# Altium PCB esp-programmer.PcbDoc
Units mm, origin at the board's own origin, x right, y up, seen from the top; angles counter-clockwise.
Board outline 34.14 x 17.02 mm, 2 copper layers (Top Layer, Bottom Layer); 18 components, 17 nets, 73 pads, 35 vias.
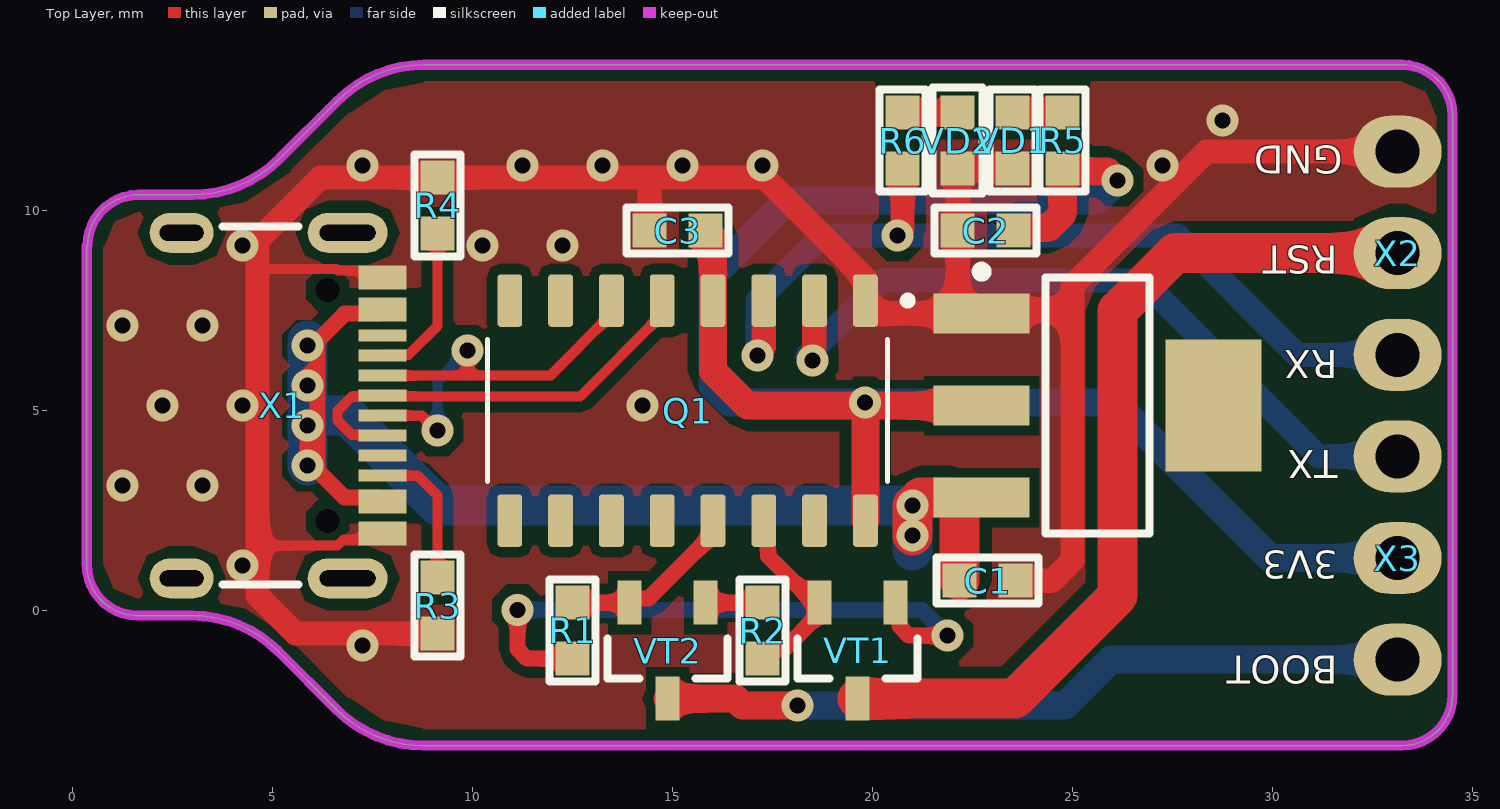
[diagram p0: Top Layer view]
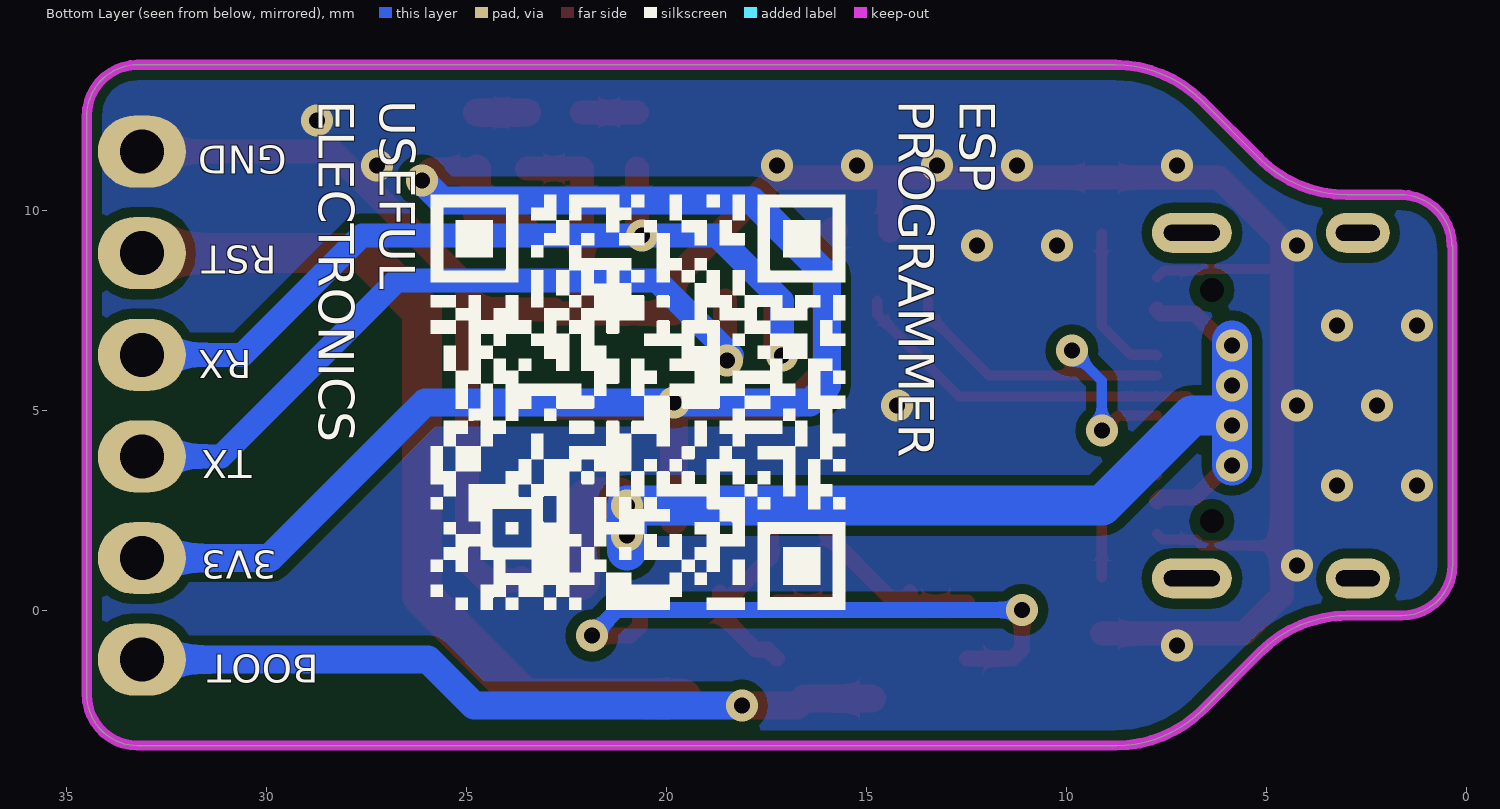
[diagram p1: Bottom Layer view, seen from below]
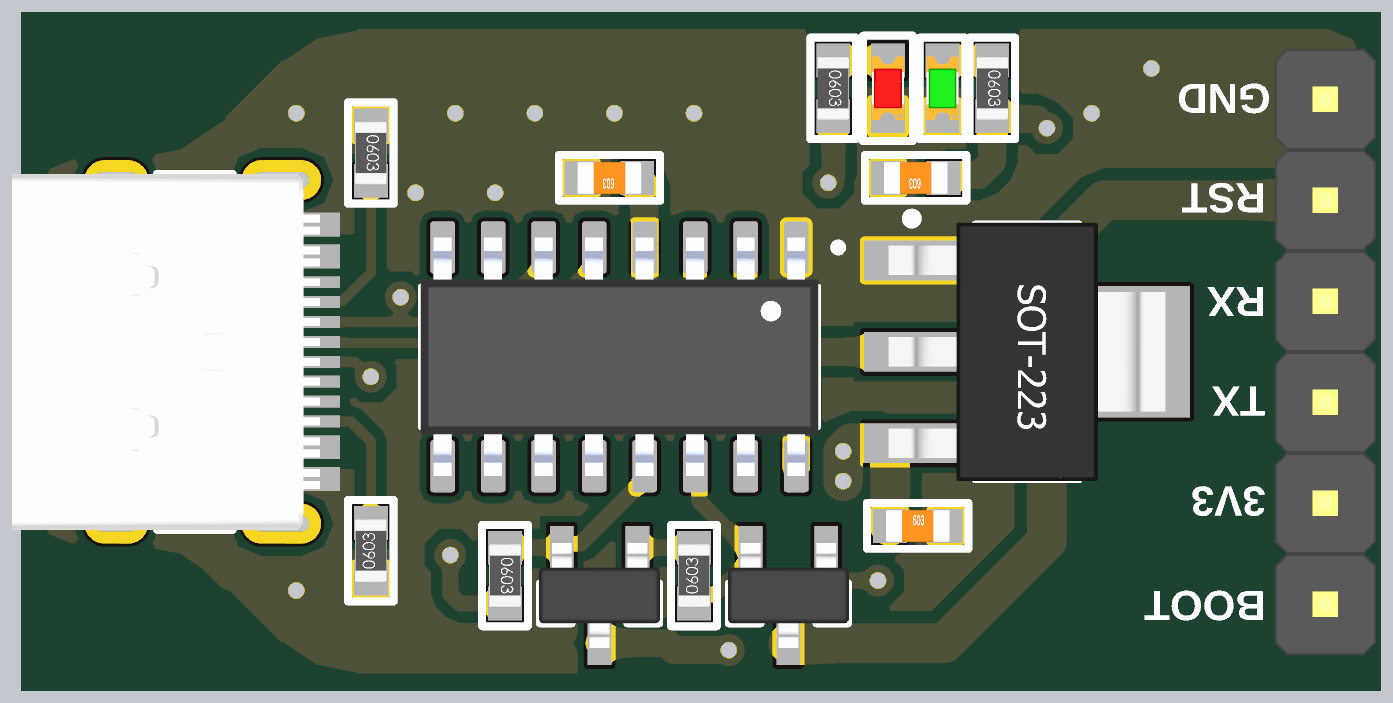
[diagram p2: 3D render of the assembled board from above, using the file's embedded part models]

## Layer stack, top to bottom
Top Solder: solder mask 0.0102, Solder Resist, Dk 3.5
Top Layer: signal copper 0.0356
Dielectric 1: dielectric 0.32, FR-4, Dk 4.8
Bottom Layer: signal copper 0.0356
Bottom Solder: solder mask 0.0102, Solder Resist, Dk 3.5

## Board outline
1.625,-0.125 2.98,-0.125 cw(c2.98,-3.191) 5.148,-1.023 6.602,-2.477 ccw(c8.77,-0.309) 8.77,-3.375 33.23,-3.375 ccw(c33.23,-2.105) 34.5,-2.105 34.5,12.375 ccw(c33.23,12.375) 33.23,13.645 31.923,13.645 8.79,13.645 ccw(c8.79,10.579) 6.622,12.747 5.168,11.293 cw(c3,13.461) 3,10.395 1.645,10.395 ccw(c1.645,9.125) 0.375,9.125 0.355,9.125 0.355,1.145 ccw(c1.625,1.145)

## Design rules (kind name [scope] priority, off if disabled: settings)
Clearance [All] p1: gap=0.1 ignorepadtopadclearanceinfootprint=FALSE except(0.25: Arc-Poly Track-Poly SMDPad-Poly THPad-Poly Via-Poly Fill-Poly Poly-Poly)
ComponentClearance [All] p1: gap=0 collisioncheckmode=3 verticalgap=0 showdistances=FALSE
PolygonConnect [All] p1: connectstyle=Direct reliefconductorwidth=0.254 reliefentries=4 polygonreliefangle="90 Angle" airgapwidth=0.254
RoutingVias [All] p1: holewidth=0.711 width=1.27 viastyle="Through Hole" minholewidth=0.2 minwidth=0.5 maxholewidth=0.711 maxwidth=1.27
SolderMaskExpansion [All] p1: expansion=0.102 istentingtop=FALSE
Width [All] p1: maxlimit=2 minlimit=0.2 preferedwidth=0.5
29 further rules are at their usual default settings.

## Components (designator, comment, footprint, x,y, rotation, side; value= is the part's Value field where it differs from the comment)
C1 "CL10B104KA8NNNL" "CAP: 0603" 22.875,0.75 r0 top value=0.1μF
C2 "CL10B104KA8NNNL" "CAP: 0603" 22.825,9.5 r180 top value=0.1μF
C3 "CL10B104KA8NNNL" "CAP: 0603" 15.125,9.5 r180 top value=0.1μF
Q1 "CH340C" CH240C 15.375,5 r270 top
R1 "RC0603FR-0710KL" "RES: 0603" 12.5,-0.5 r270 top value=10k
R2 "RC0603FR-0710KL" "RES: 0603" 17.25,-0.5 r90 top value=10k
R3 "RC0603FR-075K1L" "RES: 0603" 9.125,0.125 r90 top value=5.1k
R4 "RC0603FR-075K1L" "RES: 0603" 9.125,10.125 r270 top value=5.1k
R5 "RC0603FR-07510RL" "RES: 0603" 24.75,11.75 r270 top value=510
R6 "RC0603FR-07510RL" "RES: 0603" 20.75,11.75 r270 top value=510
VD1 "HSMG-C190" "LED: 0603G" 23.5,11.75 r270 top
VD2 "155060SS75300" "LED: 0603R" 22.125,11.75 r270 top
VT1 "BC847BLT1G" SOT23 19.625,-1 r270 top
VT2 "BC847BLT1G" SOT23 14.875,-1 r270 top
X1 "USB Type C" "CON: TYPE-C-31-M-12 (USB)" 6.375,5.125 r90 top
X2 "PMbus" "CON: PLS-3" 33.125,8.935 r270 top
X3 "PMbus" "CON: PLS-3" 33.125,1.315 r270 top
? "AMS1117-3.3V" SOT223 25.625,5.125 r0 top

## Footprints (in the part's own frame and the unit in brackets; to place one, negate y for a bottom-side part, rotate by r counter-clockwise, add the part's x,y. Pads: shape width x height; smd on the part's side, far side on the other; paste and mask are expansions set on the pad)
"CAP: 0603" [mm]
  rect 0.85x0.85 smd mask+0.05: 1(-0.7,0) 2(0.7,0)
  silkscreen extent -1.28,-0.58 1.28,0.58, body extent -0.8,-0.4 0.8,0.4, height 0.3
CH240C [mm]
  rrect25% 1.31x0.62 smd: 1(-2.75,4.445) 2(-2.75,3.175) 3(-2.75,1.905) 4(-2.75,0.635) 5(-2.75,-0.635) 6(-2.75,-1.905) 7(-2.75,-3.175) 8(-2.75,-4.445) 9(2.75,-4.445) 10(2.75,-3.175) 11(2.75,-1.905) 12(2.75,-0.635) 13(2.75,0.635) 14(2.75,1.905) 15(2.75,3.175) 16(2.75,4.445)
  silkscreen extent -2.85,-5 1.78,5.6, body extent -3,-5 3,5, height 1.8
"CON: PLS-3" [mm]
  oval 1.8x2.2 hole 1.1: 1(-2.54,0) 2(0,0) 3(2.54,0)
  body extent -3.81,-1.27 3.81,1.27, height 8.54
"CON: TYPE-C-31-M-12 (USB)" [mm]
  rect 0.6x1.2 smd mask+0: A1(3.2,-1.375) A4(2.4,-1.375) B1(-3.2,-1.375) B4(-2.4,-1.375)
  rect 0.3x1.2 smd mask+0: A5(1.25,-1.375) A6(0.25,-1.375) A7(-0.25,-1.375) A8(-1.25,-1.375) B5(-1.75,-1.375) B6(-0.75,-1.375) B7(0.75,-1.375) B8(1.75,-1.375)
  oval 1x2 hole 0.4 slot 1.4 at 90 deg mask+0.075: MH(-4.32,-0.5) MH(4.32,-0.5)
  oval 1x1.6 hole 0.4 slot 1.1 at 90 deg mask+0.075: MH(-4.32,3.65) MH(4.32,3.65)
  round 0 hole 0.6 mask+0.075: MH(-2.89,0) MH(2.89,0)
  silkscreen extent -4.47,0.72 4.47,2.63, body extent -4.48,-1.48 4.48,6.28, height 3.26
"LED: 0603G" [mm]
  rect 0.85x0.85 smd mask+0.05: 1(-0.7,0) 2(0.7,0)
  silkscreen extent -1.28,-0.58 1.28,0.58, body extent -0.8,-0.4 0.8,0.4, height 0.6
"LED: 0603R" [mm]
  rect 0.85x0.85 smd: 1(-0.7,0) 2(0.7,0)
  silkscreen extent -1.33,-0.63 1.33,0.63, body extent -0.8,-0.4 0.8,0.4, height 0.6
"RES: 0603" [mm]
  rect 0.85x0.85 smd mask+0.05: 1(-0.7,0) 2(0.7,0)
  silkscreen extent -1.28,-0.58 1.28,0.58, body extent -0.8,-0.4 0.8,0.4, height 0.44
SOT23 [mm]
  rect 1.1x0.6 smd: 1(-1.2,0.95) 2(-1.2,-0.95) 3(1.2,0)
  silkscreen extent -0.3,-1.5 0.7,1.5, body extent -1.32,-1.52 1.32,1.52, height 1.12
SOT223 [mm] "SOT223, 4-Leads, Body 6,50x7,00mm (avg), Pitch 2,30mm, IPC Medium Density"
  rect 2.4x1 smd: 1(-2.9,2.3) 2(-2.9,0) 3(-2.9,-2.3)
  rect 2.4x3.3 smd: 4(2.9,0)
  round 0.5 on Mech1: ""(-3,2.7)
  silkscreen extent -3.02,-3.2 1.3,3.47, body extent -3.48,-3.25 3.48,3.25, height 1.65

## Part data
C1 C2 C3: "0.1uF, 25V, 0603, X7R, ±10%, -55...+125°C", Manufacturer=Samsung, Package=0603, HelpURL=https://ru.mouser.com/ProductDetail/Samsung-Electro-Mechanics/CL10B104KA8NNNL?qs=xZ%2FP%252Ba9zWqaq7Qa7Zbe03w%3D%3D, Manufacturer Part Number=CL10B104KA8NNNL, PartNumber=CL10B104KA8NNNL
R1 R2: "10 kOhms, 0603, ±1%, 0.1W, -55...+155°C", Manufacturer=Yageo, Package=0603, Component Type=Resistors, HelpURL=https://ru.mouser.com/ProductDetail/YAGEO/RC0603FR-0710KL?qs=%2Fha2pyFaduhXXNW8qwNUNiw8kLtHezvba1btfWQYTvQl0E5hN277pA%3D%3D, Manufacturer Part Number=RC0603FR-0710KL, PartNumber=RC0603FR-0710KL
R3 R4: "5.1 kOhms, 0603, ±1%, 0.1W, -55...+155°C", Manufacturer=Yageo, Package=0603, HelpURL=https://eu.mouser.com/ProductDetail/YAGEO/RC0603FR-075K1L?qs=gt6vzsuosg2jUUwxnI2PJQ%3D%3D, PartNumber=RC0603FR-075K1L
R5 R6: "510 Ohms, 0603, ±1%, 0.1W, -55...+155°C", Manufacturer=YAGEO, Package=0603, Component Type=Resistors, HelpURL=https://www.mouser.com/ProductDetail/YAGEO/RC0603FR-07510RL?qs=gt6vzsuosg04lV7mPQHzdw%3D%3D, Manufacturer Part Number=RC0603FR-07510RL, PartNumber=RC0603FR-07510RL
VD1: "LED, Green, case 0603, 2.2V, 20mA, -40...+85°C", Color=GREEN, Manufacturer="Broadcom / Avago", Package=0603, Component Type=Diodes, HelpURL=https://www.mouser.com/ProductDetail/Broadcom-Avago/HSMG-C190?qs=YDL0qNrpDT605sxOaps8VQ%3D%3D, Manufacturer Part Number=HSMG-C190, PartNumber=HSMG-C190
VD2: "LED, Red, case 0603, 2V, 20mA, -40...+85°C", Color=RED, Manufacturer=Wurth, Package=0603, Component Type=Diodes, HelpURL=https://ru.mouser.com/ProductDetail/Wurth-Elektronik/155060SS75300?qs=GedFDFLaBXFp%252Bdn3xLi%2Ftw%3D%3D, Manufacturer Part Number=155060SS75300, PartNumber=155060SS75300
VT1 VT2: "NPN, 45V, 100mA, 100MHz, SOT-23, -55...+150°C", Manufacturer="ON Semiconductor", Package=SOT-23, Component Type=Transistors, HelpURL=https://eu.mouser.com/ProductDetail/onsemi/BC847BLT1G?qs=vNc2DXHODiLAH81QlkcRzw%3D%3D, Manufacturer Part Number=BC847BLT1G, PartNumber=BC847BLT1G
X1: library part TYPE-C-31-M-12, "USB 3.1, Type C, 16 pins, 20V, 3.0A, -40...+85°C", Manufacturer="Korean Hroparts", Package="Type C, 16 pins", HelpURL=https://lcsc.com/product-detail/USB-Type-C_Korean-Hroparts-Elec-TYPE-C-31-M-12_C165948.html, PartNumber=TYPE-C-31-M-12
X2 X3: library part PLS-3, "3 pins, pitch 2.54 mm, 500VAC, 2A/pin, -40...+85°C", Manufacturer=Connfly, Component Type=Connectors, HelpURL=https://www.chipdip.ru/product/pls-3, Manufacturer Part Number=PLS-3, PartNumber=PLS-3, Pitch=2.54mm

## Via types
v1: diameter 0.8, hole 0.4, Top Layer to Bottom Layer, tented both sides, 35 vias

## Nets (pads, with @x,y where several pads share a name; then routed paths per layer and width w, separated by ;. In a path a pad name is that pad's centre, name@x,y a point inside that pad or via, vN(x,y) a via of type N, cw(c..) or ccw(c..) an arc to the next point about the centre after c; other vN are vias at no path point)
3V3: ?.2 C2.1 C3.1 Q1.4 Q1.16 R5.2 X3.2 | length 50.3
  Top Layer w0.7: C3.1 16.01,9.315 Q1.4 16.01,5.99 16.875,5.125 v1@19.82,5.125 ; Q1.16 v1@19.82,5.125 ; ?.2 v1@19.82,5.125 ; C2.1 23.6,9.575 24.415,9.575 24.75,9.91 R5.2 24.825,10.975 25.873,10.975 26.098,10.75 v1(26.125,10.75)
  Bottom Layer w0.7: v1(26.125,10.75) 25.625,10.25 17.875,10.25 16,8.375 16,5.625 16.419,5.206 v1(19.816,5.206) 26.044,5.206 29.935,1.315 X3.2
5V: ?.3 C1.1 X1.A4 X1.B4 | length 34.9
  Top Layer w0.4: v1(5.875,4.625) 5.875,3.75 v1@6.125,3.5 ; v1(5.875,5.625) 5.875,5.875 6.125,6.125 v1@6.125,6.75 ; v1(5.875,6.625) 6,6.625 v1@6.125,6.75 ; X1.B4 7.65,2.825 6.8,2.825 v1@6.125,3.5 ; X1.A4 7.65,7.425 6.8,7.425 v1@6.125,6.75 ; v1@6.125,3.5 v1@6.125,6.75
  Top Layer w1: v1(21,1.875) v1(21,2.625) 21.2,2.825 21.963,2.825 22.175,2.612 C1.1
  Bottom Layer w1: v1(5.875,3.625) 5.875,4.25 v1@5.875,4.875 ; v1(5.875,4.625) v1@5.875,4.875 ; v1(5.875,5.625) v1@5.875,5.5 ; v1@5.875,5.875 5.875,6.125 ; v1(5.875,6.625) 5.875,6.75 5.875,6.125 ; v1@21,1.5 v1(21,1.875) v1(21,2.625) 9.125,2.625 6.875,4.875 v1@5.875,4.875 ; v1@5.875,4.875 v1@5.875,5.5 ; v1@5.875,5.5 5.875,6.125
BOOT: VT2.3 X3.3 | length 18.8
  Top Layer w0.7: VT2.3 16.575,-2.2 16.75,-2.375 v1(18.125,-2.375)
  Bottom Layer w0.7: v1(18.125,-2.375) 24.815,-2.375 25.965,-1.225 X3.3
DTR: Q1.13 R1.1 VT2.2 | length 4.8
  Top Layer w0.4: R1.1 VT2.2 ; VT2.2@13.925,0.45 VT2.2 ; Q1.13 16.01,1.905 15.9,1.795 15.89,1.795 14.395,0.3 14.025,0.3 VT2.2
GND: ?.1 C1.2 C2.2 C3.2 Q1.1 R3.1 R4.1 VD1.2 VD2.2 X1.A1 X1.B1 X2.1 | length 67.8
  Top Layer w0.25: 4.625,1.625 6.625,1.625 6.775,1.775 7.6,1.775 X1.B1 ; 4.625,8.5 4.665,8.54 6.592,8.54 6.632,8.5 6.875,8.5 7.575,8.5 X1.A1
  Top Layer w0.6: R3.1 5.575,-0.575 4.625,0.375 4.625,1.625 4.625,8.5 4.625,9.25 6.2,10.825 R4.1 14.375,10.825 ; C3.2 14.425,10.775 14.375,10.825 ; VD1.2 VD2.2 C2.2 22.125,7.625 ?.1@22.325,7.425 ; C1.2@23.636,0.811 C1.2 24.5,0.75 25,1.25 25,8.125 28.35,11.475 X2.1 ; 25,7.524 22.824,7.524 ?.1 ?.1@22.325,7.425 ; 14.375,10.825 17.3,10.825 19.81,8.315 19.81,7.445 19.83,7.425 ?.1@22.325,7.425
  other v1: 7.25,-0.875 4.25,1.125 1.25,3.125 3.25,3.125 2.25,5.125 4.25,5.125 14.25,5.125 1.25,7.125 3.25,7.125 4.25,9.125 10.25,9.125 12.25,9.125 7.25,11.125 11.25,11.125 13.25,11.125 15.25,11.125 17.25,11.125 27.25,11.125 28.75,12.25
NetR1_2: R1.2 VT1.1 | length 15.4
  Top Layer w0.4: v1@11.125,0 11.125,-0.966 11.359,-1.2 R1.2 ; VT1.1 20.675,0.1 20.675,-0.391 20.909,-0.625 v1(21.875,-0.625)
  Bottom Layer w0.4: v1(11.123,0.016) 21.234,0.016 v1(21.875,-0.625)
NetR2_2: R2.2 VT2.1 | length 1.4
  Top Layer w0.4: VT2.1 R2.2
NetR3_2: R3.2 X1.B5 | length 3.6
  Top Layer w0.254: X1.B5 8.625,3.375 9.125,2.875 R3.2
NetR4_2: R4.2 X1.A5 | length 4
  Top Layer w0.254: X1.A5 7.773,6.398 8.398,6.398 9.125,7.125 R4.2
NetR5_1: R5.1 VD1.1 | length 1.2
  Top Layer w0.7: VD1.1 R5.1
NetR6_1: R6.1 VD2.1 | length 1.4
  Top Layer w0.6: R6.1 VD2.1
RST: VT1.3 X2.2 | length 22.3
  Top Layer w1: VT1.3 23.55,-2.2 26.125,0.375 26.125,7.5 27.56,8.935 X2.2
RTS: Q1.14 R2.1 VT1.2 | length 5.1
  Top Layer w0.4: R2.1 17.475,-0.975 17.775,-0.975 18.575,-0.175 18.575,0.1 VT1.2 ; Q1.14 17.39,2.14 17.39,1.36 18.45,0.3 18.575,0.3 VT1.2 ; VT1.2@18.675,0.45 VT1.2
RX: Q1.3 R6.2 X2.3 | length 22.4
  Top Layer w0.6: v1(17.125,6.375) 17.125,6.429 17.28,6.584 Q1.3 ; v1(20.625,9.375) 20.625,9.429 20.75,9.554 R6.2
  Bottom Layer w0.6: v1(17.125,6.375) 17.125,7.75 18.75,9.375 v1(20.625,9.375) 27.625,9.375 30.605,6.395 X2.3
TX: Q1.2 X3.1 | length 18.9
  Top Layer w0.6: v1(18.5,6.25) 18.5,6.304 18.54,6.344 18.54,7.74 Q1.2
  Bottom Layer w0.6: v1@18.375,6.375 20.251,8.251 20.499,8.251 20.5,8.25 26.75,8.25 31.145,3.855 X3.1
USB+: Q1.5 X1.A6 X1.B6 | length 11
  Top Layer w0.254: X1.A6@7.674,5.352 6.977,5.352 6.625,5 6.625,4.75 6.977,4.398 7.727,4.398 X1.B6 ; X1.A6@7.699,5.352 X1.A6@7.727,5.352 ; X1.A6@7.745,5.37 X1.A6 7.773,5.352 12.687,5.352 14.74,7.405 Q1.5
USB-: Q1.6 X1.A7 X1.B7 | length 12.9
  Top Layer w0.254: X1.A7 8.724,4.875 9.099,4.5 v1(9.125,4.5) ; X1.B7 9.875,5.875 v1(9.875,6.5) ; X1.B7@8.125,5.875 11.94,5.875 13.47,7.405 Q1.6
  Bottom Layer w0.254: v1(9.125,4.5) 9.125,5.75 v1(9.875,6.5)
pads on no net: ?. ?.4 Q1.7 Q1.8 Q1.9 Q1.10 Q1.11 Q1.12 Q1.15 X1.A8 X1.B8 X1.MH

## Polygon pours and split planes (outlines as drawn)
GND on Top Layer (solid, remove dead copper, pour order 0): 1.625,-0.125 2.98,-0.125 cw(c2.98,-3.191) 5.148,-1.023 6.602,-2.477 ccw(c8.77,-0.309) 8.77,-3.375 33.23,-3.375 ccw(c33.23,-2.105) 34.5,-2.105 34.5,12.375 ccw(c33.23,12.375) 33.23,13.645 31.923,13.645 8.79,13.645 ccw(c8.79,10.579) 6.622,12.747 5.168,11.293 cw(c3,13.461) 3,10.395 1.645,10.395 ccw(c1.645,9.125) 0.375,9.125 0.355,9.125 0.355,1.145 ccw(c1.625,1.145)
GND on Bottom Layer (solid, remove dead copper, pour order 1): 1.625,-0.125 2.98,-0.125 cw(c2.98,-3.191) 5.148,-1.023 6.602,-2.477 ccw(c8.77,-0.309) 8.77,-3.375 33.23,-3.375 ccw(c33.23,-2.105) 34.5,-2.105 34.5,12.375 ccw(c33.23,12.375) 33.23,13.645 31.923,13.645 8.79,13.645 ccw(c8.79,10.579) 6.622,12.747 5.168,11.293 cw(c3,13.461) 3,10.395 1.645,10.395 ccw(c1.645,9.125) 0.375,9.125 0.355,9.125 0.355,1.145 ccw(c1.625,1.145)

## Keep-outs
Keep-Out Layer:
  lines w0.254: 0.355,9.125 0.355,1.145 ccw(c1.625,1.145) 1.625,-0.125 2.98,-0.125 cw(c2.98,-3.191) 5.148,-1.023 6.602,-2.477 ccw(c8.77,-0.309) 8.77,-3.375 33.23,-3.375 ccw(c33.23,-2.105) 34.5,-2.105 34.5,12.375 ccw(c33.23,12.375) 33.23,13.645 31.923,13.645 8.79,13.645 ccw(c8.79,10.579) 6.622,12.747 5.168,11.293 cw(c3,13.461) 3,10.395 1.645,10.395 ccw(c1.645,9.125) 0.375,9.125

## Silkscreen, mask and mechanical layers (free items; w line width, h text height)
Top Overlay:
  text "GND" at 31.75,11.861 h1.2 r180
  text "RST" at 31.625,9.361 h1.2 r180
  text "RX" at 31.625,6.75 h1.2 r180
  text "TX" at 31.625,4.25 h1.2 r180
  text "3V3" at 31.625,1.736 h1.2 r180
  text "BOOT" at 31.625,-0.889 h1.2 r180
Bottom Overlay:
  drawing of 87 lines, arcs and shapes, not listed
  text "ESP / PROGRAMMER" at 14.5,12.761 h1.52 r90
  text "USEFUL  / ELECTRONICS" at 29,12.761 h1.52 r90
  text "GND" at 29.5,11.861 h1.2 r180
  text "RST" at 29.75,9.361 h1.2 r180
  text "RX" at 30.375,6.75 h1.2 r180
  text "TX" at 30.375,4.25 h1.2 r180
  text "3V3" at 29.75,1.736 h1.2 r180
  text "BOOT" at 28.705,-0.868 h1.2 r180
Mechanical 15:
  lines w0.254: 6.375,5.125 33.125,5.125